# EAGLE board harp rfid reader (EAGLE 9.5.1)
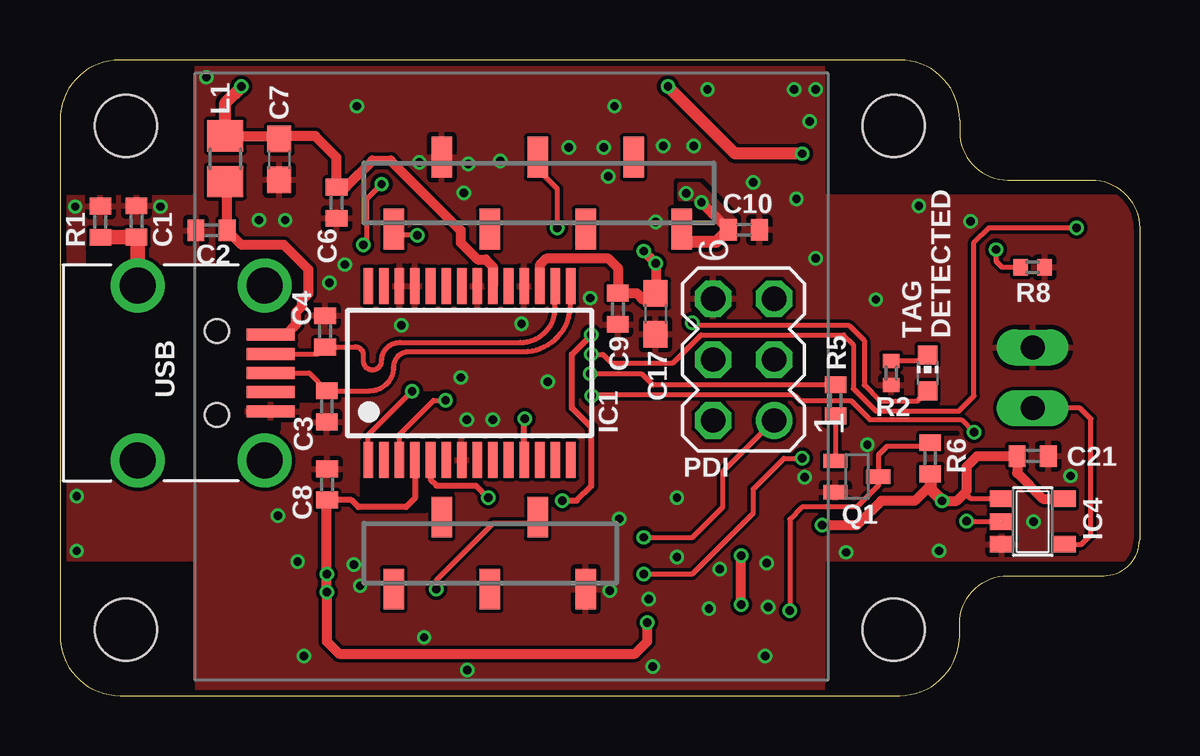
[diagram p0: board, top side]
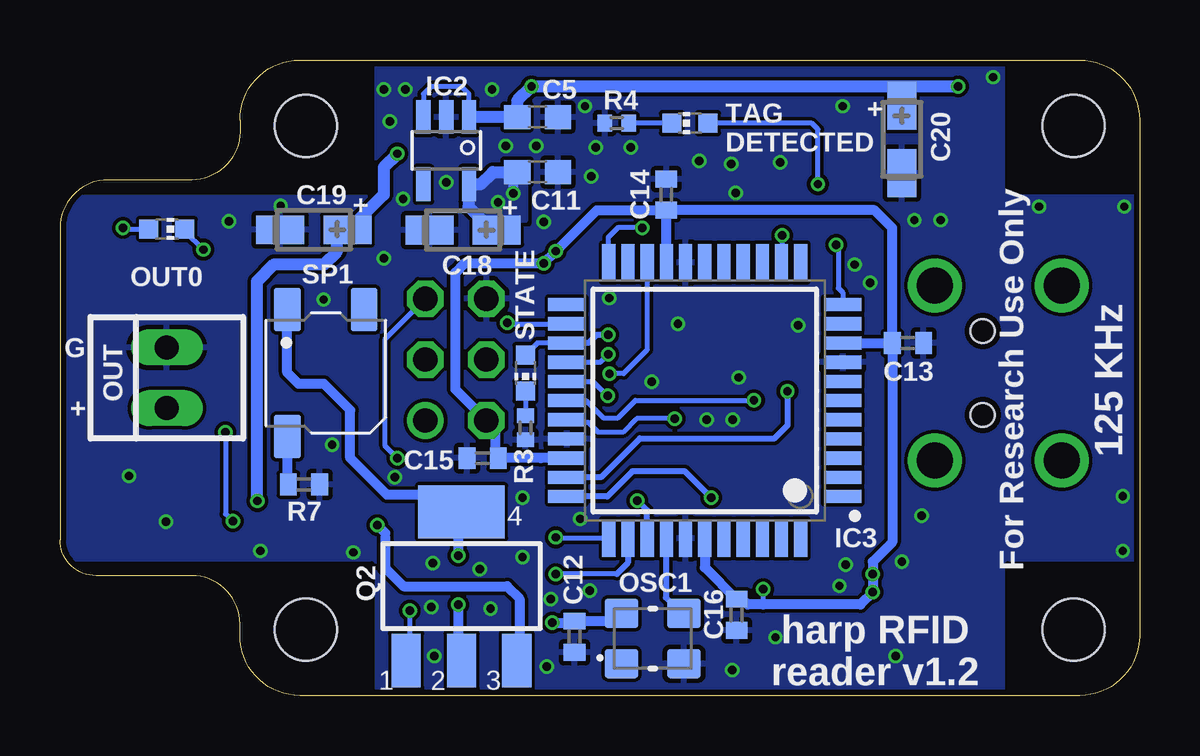
[diagram p1: board, bottom side, seen from below]

Size 45 x 26.5 mm. Coordinates in mm from the lower left corner, seen from the top.
Outline: 35,0 arc90 37.5,2.5 37.5,3 arc-90 39.5,5 43.5,5 arc90 45,6.5 45,19.5 arc90 43,21.5 39.5,21.5 arc-90 37.5,23.5 37.5,24 arc90 35,26.5 2.5,26.5 arc90 0,24 0,2.5 arc90 2.5,0 35,0
Copper layers (1*16): Top 0.018mm / dielectric 1.55mm / Bottom 0.018mm
Design rules "eC_2Layer_PClass6_BaseCopperO18_eCDefault *": minimum track width 0.15mm, minimum drill 0.35mm, track to track 0.15mm, track to pad 0.15mm, pad to pad 0.15mm, via to via 0.15mm, smd to smd 0mil, copper to edge 0.25mm, drill to drill 0.35mm, minimum pad ring 0.175mm, minimum via ring 0.125mm, stop-mask expansion 0mil, vias tented up to drill 0.45mm, thermal gap 0.2mm
Holes 2.6 mm at 2.75,23.75 34.75,23.75 2.75,2.75 34.75,2.75
tRestrict: 17 lines
bRestrict: 9 lines

## Footprints (pad centres in the part's own frame; a part is rotated, then mirrored left to right if it is on the bottom)
C0402 = smd 0.7 x 0.9: 1 -0.65,0; 2 0.65,0
C0603 = smd 1.1 x 1: 1 -0.85,0; 2 0.85,0
CT3216 = smd 2 x 1.2: + -1.4,0; - 1.4,0
SSOP28 = smd 0.4 x 1.5: 1 -4.225,-3.625; 2 -3.575,-3.625; 3 -2.925,-3.625; 4 -2.275,-3.625; 5 -1.625,-3.625; 6 -0.975,-3.625; 7 -0.325,-3.625; 8 0.325,-3.625; 9 0.975,-3.625; 10 1.625,-3.625; 11 2.275,-3.625; 12 2.925,-3.625; 13 3.575,-3.625; 14 4.225,-3.625; 15 4.225,3.625; 16 3.575,3.625; 17 2.925,3.625; 18 2.275,3.625; 19 1.625,3.625; 20 0.975,3.625; 21 0.325,3.625; 22 -0.325,3.625; 23 -0.975,3.625; 24 -1.625,3.625; 25 -2.275,3.625; 26 -2.925,3.625; 27 -3.575,3.625; 28 -4.225,3.625
TSOT23-5 = smd 0.6 x 1.408: 1 -0.95,-1.404; 2 0,-1.404; 3 0.95,-1.404; 4 0.95,1.404; 5 -0.95,1.404
QFP80P1200X1200X120-44N = smd 1.55 x 0.55: 1 -5.75,4; 2 -5.75,3.2; 3 -5.75,2.4; 4 -5.75,1.6; 5 -5.75,0.8; 6 -5.75,0; 7 -5.75,-0.8; 8 -5.75,-1.6; 9 -5.75,-2.4; 10 -5.75,-3.2; 11 -5.75,-4; 23 5.75,-4; 24 5.75,-3.2; 25 5.75,-2.4; 26 5.75,-1.6; 27 5.75,-0.8; 28 5.75,0; 29 5.75,0.8; 30 5.75,1.6; 31 5.75,2.4; 32 5.75,3.2; 33 5.75,4 | smd 0.55 x 1.55: 12 -4,-5.75; 13 -3.2,-5.75; 14 -2.4,-5.75; 15 -1.6,-5.75; 16 -0.8,-5.75; 17 0,-5.75; 18 0.8,-5.75; 19 1.6,-5.75; 20 2.4,-5.75; 21 3.2,-5.75; 22 4,-5.75; 34 4,5.75; 35 3.2,5.75; 36 2.4,5.75; 37 1.6,5.75; 38 0.8,5.75; 39 0,5.75; 40 -0.8,5.75; 41 -1.6,5.75; 42 -2.4,5.75; 43 -3.2,5.75; 44 -4,5.75
SOT23-5 = smd 0.69 x 0.99: 1 -0.95,-1.29; 2 0,-1.29; 3 0.95,-1.29; 4 0.95,1.3; 5 -0.95,1.3
R0805 = smd 1.3 x 1.5: 1 -0.95,0; 2 0.95,0
CNP-MISCELLANEOUS_OSCILLATOR_3.2X2.5 = smd 1.4 x 1.2: P$1 -1.3,-1.05; P$2 1.3,-1.05; P$3 1.3,1.05; P$4 -1.3,1.05
22-23-2021 = drill 1 long: 1 -1.27,0; 2 1.27,0
CHIP-LED0603 = smd 0.8 x 0.8: A 0,-0.75; C 0,0.75
MA03-2 = drill 1.016: 1 -2.54,-1.27 | drill 1.016 octagon: 2 -2.54,1.27; 3 0,-1.27; 4 0,1.27; 5 2.54,-1.27; 6 2.54,1.27
SOT323-BEC = smd 0.6 x 1: B -0.65,-0.9; C 0,0.9; E 0.65,-0.9
SOT223 = smd 1.219 x 2.235: 1 -2.311,-3.099; 2 0,-3.099; 3 2.311,-3.099 | smd 3.6 x 2.2: 4 0,3.099
R0402 = smd 0.7 x 0.9: 1 -0.65,0; 2 0.65,0
R0402' = smd 0.6 x 0.7: 1 -0.5,0; 2 0.5,0
BUZZER-COIL_SMT-0540-S-R = smd 1.1 x 1.8: 3 1.6,2.65; + -1.6,2.65; - -1.6,-2.65
ID-12_SMD = smd 0.85 x 1.7: 1 16.248,3.81; 2 14.248,6.81; 3 12.248,3.81; 4 10.248,6.81; 5 8.248,3.81; 6 8.248,18.822; 7 10.248,21.822; 8 12.248,18.822; 9 14.248,21.822; 10 16.248,18.822; 11 20.248,18.822; NC 18.248,21.822
240-0002-1 = smd 0.5 x 2: P$1 -1.6,8.65; P$2 -0.8,8.65; P$3 0,8.65; P$4 0.8,8.65; P$5 1.6,8.65 | drill 1.5: SHIELD_1 -3.65,3.1; SHIELD_2 3.65,3.1; SHIELD_3 3.65,8.4; SHIELD_4 -3.65,8.4 | hole 1: -1.75,6.4; 1.75,6.4

## Placement (x,y rotation side)
C1  4.7nF  [C0402]  3.19,19.77 90 top
C2  100nF  [C0402]  6.32,19.39 180 top
C3  47pF  [C0402]  11.12,12.06 270 top
C4  47pF  [C0402]  11.05,15.18 90 top
C5  10uF  [C0603]  25.09,24.12 0 bottom
C6  100nF  [C0402]  11.53,20.55 270 top
C7  10uF  [C0603]  9.14,22.35 270 top
C8  100nF  [C0402]  11.13,8.8 90 top
C9  100nF  [C0402]  23.26,16.13 270 top
C10  100nF  [C0402]  28.51,19.42 0 top
C11  10uF  [C0603]  25.09,21.83 0 bottom
C12  100nF  [C0402]  23.55,2.46 270 bottom
C13  100nF  [C0402]  9.65,14.7 0 bottom
C14  100nF  [C0402]  19.72,20.88 90 bottom
C15  100nF  [C0402]  27.38,9.9 180 bottom
C16  100nF  [C0402]  16.8,3.37 270 bottom
C17  10uF  [C0603]  24.83,15.92 270 top
C18  100uF  [CT3216]  28.19,19.41 180 bottom
C19  100uF  [CT3216]  34.42,19.42 180 bottom
C20  100uF  [CT3216]  9.91,23.19 270 bottom
C21  100nF  [C0402]  40.55,9.99 0 top
IC1  FT232RL  [SSOP28]  17.07,13.45 0 top
IC2  LP5907MFX-3.3  [TSOT23-5]  28.9,22.72 180 bottom
IC3  ATXMEGA32A4U-AU  [QFP80P1200X1200X120-44N]  18.12,12.3 180 bottom
IC4  [SOT23-5]  40.55,7.25 270 top
L1  ???  [R0805]  6.89,22.38 270 top
OSC1  CNP-MISCELLANEOUS_OSCILLATOR  [CNP-MISCELLANEOUS_OSCILLATOR_3.2X2.5]  20.29,2.38 0 bottom
OUT  22-23-2021  [22-23-2021]  40.55,13.25 90 bottom
OUT0  [CHIP-LED0603]  40.55,19.45 270 bottom
PDI  [MA03-2]  28.49,14.01 90 top
Q1  BC817-40W  [SOT323-BEC]  33.22,9.13 270 top
Q2  [SOT223]  28.27,4.56 0 bottom
R1  1M  [R0402]  1.68,19.75 90 top
R2  1k  [R0402']  34.65,13.45 90 top
R3  1k  [R0402']  25.6,11.16 90 bottom
R4  1k  [R0402']  21.79,23.86 0 bottom
R5  10k  [R0402]  32.33,12.31 270 top
R6  1k  [R0402]  36.27,9.89 90 top
R7  75 >1/4W  [R0402]  34.83,8.8 180 bottom
R8  1k  [R0402']  40.55,17.86 180 top
SP1  BUZZER-COIL_SMT-0540-S-R  [BUZZER-COIL_SMT-0540-S-R]  33.92,13.45 0 bottom
STATE  [CHIP-LED0603]  25.6,13.45 180 bottom
TAG_B  [CHIP-LED0603]  18.74,23.86 90 bottom
TAG_T  [CHIP-LED0603]  36.16,13.45 0 top
U1  ID-12/20SMD  [ID-12_SMD]  5.67,0.63 0 top
USB  [240-0002-1]  0.13,13.45 270 top

## Library data of the parts
C1-C17 C21 L1 R1 R5-R7 = rcl
C18-C20 = rcl; SPICEPREFIX: C
IC1 = ftdichip; MPN: FT232RL; OC_FARNELL: 1146032; OC_NEWARK: 91K9918
IC2 = CNP
IC3 = xmega-a4
IC4 = 74xx-little-de
OSC1 SP1 = harp rfid reader v1.0
OUT = con-molex; MF: MOLEX; MPN: 22-23-2021; OC_FARNELL: 1462926; OC_NEWARK: 25C3832
OUT0 STATE TAG_B TAG_T = led
PDI = con-lstb; OC_FARNELL: unknown; OC_NEWARK: unknown
Q1 = transistor-npn
Q2 = zetex; OC_FARNELL: unknown; OC_NEWARK: unknown
R2-R4 R8 = rcl; SPICEPREFIX: R
U1 = SparkFun
USB = CNP-connectors

## Nets
+5V: C5.1 C6.1 C7.1 C19.+ C20.+ C21.1 IC1.20 IC2.1 IC2.3 IC4.1 IC4.5 L1.1 Q2.3 R6.1
BUZ: IC3.20 R5.1
BUZ_T: Q2.2 Q2.4 SP1.+
DETECT1: IC3.11 TAG_B.A
DETECT2: IC3.24 TAG_T.A
F2: IC3.13 U1.6
FT_CTS: IC1.11 IC3.29
FT_RTS: IC1.3 IC3.28
FT_RXD: IC1.5 IC3.33
FT_TXD: IC1.1 IC3.32
GND: C1.2 C2.2 C3.2 C4.2 C5.2 C6.2 C7.2 C8.2 C9.2 C10.2 C11.2 C12.2 C13.2 C14.2 C15.2 C16.2 C17.2 C18.- C19.- C20.- C21.2 IC1.7 IC1.18 IC1.21 IC1.25 IC1.26 IC2.2 IC3.8 IC3.18 IC3.30 IC3.38 IC4.3 OSC1.P$2 OUT.2 PDI.6 Q1.E R1.2 R2.1 R3.1 R4.1 R7.1 R8.1 U1.1 U1.7 USB.P$5
N$1: C10.1 C11.1 C18.+ IC2.5 U1.11
N$2: R3.2 STATE.C
N$3: C1.1 R1.1 USB.SHIELD_1
N$4: R4.2 TAG_B.C
N$5: R2.2 TAG_T.C
N$6: OUT0.C R8.2
N$7: IC4.4 OUT.1
N$20: R7.2 SP1.-
N$25: Q1.C Q2.1 R6.2
N$27: Q1.B R5.2
N$39: C2.1 L1.2 USB.P$1
OSC1: IC3.37 OSC1.P$3
OUT0: IC3.27 IC4.2
OUT0_LED: IC3.26 OUT0.A
PDI-CLK: IC3.35 PDI.5
PDI-DATA: IC3.34 PDI.1
STATE: IC3.25 IC3.36 STATE.A
TX: IC3.22 U1.9
USBDM: C4.1 IC1.16 USB.P$2
USBDP: C3.1 IC1.15 USB.P$3
VCCIO: C8.1 C9.1 C12.1 C13.1 C14.1 C15.1 C16.1 C17.1 IC1.4 IC1.17 IC3.9 IC3.19 IC3.31 IC3.39 OSC1.P$4 PDI.2 U1.2

## Tracks (layer width: path | path; a pad name or v marks a point on that pad's centre or on a via)
+5V  (via drill 0.35)
  Top 0.203: IC4.1 37.97,8.2 37.72,8.46
  Top 0.406: R6.1 36.27,8.76 35.63,8.12 34.23,8.12 33.22,7.1 v31.76,7.1 | IC1.20 18.05,17.88 17.75,18.18 17.41,18.18 16.71,18.88 16.71,19.39 13.79,22.31 13.02,22.31 11.91,21.2 C6.1 11.53,22.44 10.64,23.33 9.01,23.33 | L1.1 9.01,23.33 | 9.01,23.33 C7.1 | v36.77,8.12 37.38,8.12 37.72,8.46 37.8,8.53 37.8,9.55 38.23,9.99 C21.1 39.9,9.28 40.97,8.2 IC4.5
  Top 0.508: L1.1 6.89,24.72 v7.56,25.39 | R6.1 36.27,8.62 v36.77,8.12 | v30.93,22.59 28.14,22.59 v25.34,25.39
  Bottom 0.203: IC2.1 27.95,25.07 28.27,25.39 29.54,25.39 29.85,25.07 IC2.3 | 31.44,6.78 31.44,6.59
  Bottom 0.406: v31.76,7.1 31.44,6.78 | 31.44,6.59 31.44,5.32 30.68,4.56 26.36,4.56 25.85,4.05 25.85,1.56 Q2.3
  Bottom 0.508: IC2.1 C5.1 25.94,24.79 v25.34,25.39 9.96,25.39 | v7.56,25.39 9.96,25.39 | v36.77,8.12 36.78,8.12 36.78,17.27 36.07,17.98 33.98,17.98 33.45,18.52 33.45,18.93 C19.+ 32.88,19.51 31.5,20.88 31.5,22.02 v30.93,22.59 | C20.+ 9.91,25.34 9.96,25.39
BUZ  (via drill 0.35)
  Top 0.203: v22.09,13.43 24.23,13.43 24.71,12.94 32.31,12.94 R5.1
  Bottom 0.203: IC3.20 20.52,14.41 21.51,13.43 v22.09,13.43
BUZ_T  (via drill 0.35)
  Top 0.406: v28.39,3.8 v28.39,5.83
  Bottom 0.406: Q2.2 28.39,1.59 v28.39,3.8 | v28.39,5.83 28.39,7.53 Q2.4 28.27,7.99 28.65,8.37 31.37,8.37 32.9,9.9 32.9,11.9 34,13 35.06,13 35.52,13.46 SP1.+
DETECT1  (via drill 0.35)
  Top 0.203: v12.64,18.78 12.77,18.91 12.77,20.69 v13.41,21.32
  Bottom 0.203: v13.41,21.32 13.41,23.61 13.66,23.86 TAG_B.A | IC3.11 12.37,16.8 12.55,16.98 12.55,18.69 v12.64,18.78
DETECT2  (via drill 0.35)
  Top 0.203: v26.36,15.55 26.49,15.42 32.9,15.42 33.52,14.8 33.52,12.94 34.18,12.28 35.75,12.28 TAG_T.A
  Bottom 0.203: v26.36,15.55 26.31,15.5 IC3.24
F2  (via drill 0.35)
  Top 0.203: v14.9,19.19 14.17,19.19 U1.6
  Bottom 0.203: v14.9,19.19 14.9,18.08 IC3.13
FT_CTS  (via drill 0.35)
  Top 0.254: IC1.11 19.35,11.52 v19.38,11.54
  Bottom 0.203: v19.38,11.54 20.97,11.54 21.54,10.97 22.55,10.97 22.96,11.38 23.75,11.38 IC3.29
FT_RTS  (via drill 0.35)
  Top 0.203: IC1.3 14.15,10.89 15.56,12.31 v16.07,12.31
  Bottom 0.203: IC3.28 23.07,12.3 22.35,11.58 21.74,11.58 21.02,12.31 v16.07,12.31
FT_RXD  (via drill 0.35)
  Top 0.254: IC1.5 15.45,8.99 15.69,8.75 17.34,8.75 v17.85,8.24
  Bottom 0.254: v17.85,8.24 18.95,9.35 21.14,9.35 22.18,8.3 IC3.33
FT_TXD  (via drill 0.35)
  Top 0.203: IC1.1 12.85,10.86 v14.68,12.69
  Bottom 0.254: v14.68,12.69 14.68,11.27 15.22,10.72 20.83,10.72 22.45,9.1 IC3.32
GND  (via drill 0.35)
  other vias: 28.89,21.4 30.61,25.27 31.5,25.27 31.24,23.94 34.01,16.51 31.5,18.22 30.7,20.71 35.8,20.42 24.83,19.75 22.86,21.65 22.67,22.86 25.15,22.92 26.42,22.92 29.4,1.65 24.7,1.21 24.54,4.03 27.05,3.62 29.53,3.68 27.5,5.27 29.46,5.52 25.72,5.78 22.92,4.38 23.3,7.37 25.72,8.26 32.77,5.97 36.64,6.03 33.66,10.46 31.04,9.11 16.98,1.07 15.18,2.43 10.16,1.65 12.51,4.57 12.26,5.46 9.91,5.59 9.08,7.49 0.7,6.03 0.7,8.32 20.33,13.08 18.03,11.49 16.95,11.49 16.7,13.26 22.1,16.57 19.24,15.49 14.22,15.43 11.23,17.21 11.87,17.97 0.64,20.38 4.19,20.38 17.02,22.16 16.83,20.95 18.35,22.29 14.99,22.23 21.21,22.86 12.38,24.57 23.11,24.57 26.99,25.27 6.1,25.78 8.29,19.82 9.39,19.82 40.58,7.25 42.13,9.16 37.96,19.77
  pour Bottom (rank 2): 45.5,-0.5 45.5,27 0,27 0,-0.5
  pour Top (rank 2): 46,-0.5 46,27 0,27 0,-0.5
N$1  (via drill 0.35)
  Top 0.406: C10.1 27.86,19.44 v26.74,20.56
  Top 0.508: C10.1 27.35,18.91 25.91,18.91 U1.11
  Bottom 0.406: C11.1 26.11,21.67 v26.11,20.94
  Bottom 0.508: C11.1 26.96,21.83 27.47,21.32 IC2.5 27.98,21.29 27.98,20.38 27,19.41 C18.+
  pour Bottom (no thermals): 25.6,21.73 25.6,19.8 27.68,19.8 27.68,21.02 26.97,21.73
  pour Top (no thermals): 25.85,21.32 26.61,21.32 28.13,19.81 28.13,19.54 27.62,19.54 26.61,20.55 26.61,20.56 26.49,20.69 25.85,20.69
N$2
  Bottom 0.203: STATE.C R3.2
N$3
  Top 0.61: R1.1 1.7,19.12 C1.1 3.23,19.08 USB.SHIELD_1
N$4
  Bottom 0.203: TAG_B.C R4.2
N$5
  Top 0.203: TAG_T.C 35.91,13.95 R2.2
N$6  (via drill 0.35)
  Top 0.203: v39.01,18.59 39.01,18.11 39.27,17.86 R8.2
  Bottom 0.203: OUT0.C 39.8,19.38 v39.01,18.59
N$7
  Top 0.203: IC4.4 42.58,6.3 42.98,6.71 42.98,11.53 42.52,11.99 OUT.1
N$20
  Bottom 0.406: R7.2 35.52,8.84 SP1.-
N$25  (via drill 0.35)
  Top 0.203: R6.2 36.13,10.4 34.49,10.4 34.12,10.03 Q1.C 34.12,8.76 33.22,7.86 30.93,7.86 30.42,7.35 v30.42,3.54
  Bottom 0.203: v30.42,3.54 30.42,1.61 Q2.1
N$27
  Top 0.203: R5.2 32.33,9.79 Q1.B
N$39
  Top 0.406: USB.P$1 9.42,15.05 9.85,15.48 9.85,15.99 10.1,16.24 10.1,16.5 10.36,16.75 10.36,17.77 9.34,18.78 7.58,18.78 C2.1 6.97,21.36 L1.2
OSC1
  Bottom 0.254: IC3.37 19.75,6.52 19.75,4.09 19.09,3.43 OSC1.P$3
OUT0  (via drill 0.35)
  Top 0.203: v22.17,12.5 22.2,12.52 30.61,12.52 30.84,12.29 32.97,12.29 33.76,11.51 37.57,11.51 v38.1,10.97 | v37.8,7.26 39.25,7.26 IC4.2
  Bottom 0.203: IC3.27 22.78,13.1 v22.17,12.5 | v38.1,10.97 38.1,7.57 v37.8,7.26
OUT0_LED  (via drill 0.35)
  Top 0.203: v22.15,14.22 22.63,14.22 22.99,13.87 25.55,13.87 26.72,15.04 32.66,15.04 33.07,14.63 33.07,12.8 34.01,11.86 37.46,11.86 38.1,12.5 38.1,18.9 38.71,19.51 v42.37,19.51
  Bottom 0.203: IC3.26 22.47,13.9 v22.15,14.22 | v42.37,19.51 42.31,19.45 OUT0.A
PDI-CLK  (via drill 0.35)
  Top 0.203: v24.33,5.07 26.36,5.07 28.9,7.61 28.9,8.62 30.17,9.89 v30.93,9.89
  Bottom 0.203: 21.79,5.07 v24.33,5.07 | v30.93,9.89 31.44,10.4 31.44,14.87 PDI.5
  Bottom 0.254: IC3.35 21.32,5.53 21.79,5.07
PDI-DATA  (via drill 0.35)
  Top 0.203: v24.33,6.59 26.36,6.59 27.63,7.86 27.63,9.34 PDI.1
  Bottom 0.203: IC3.34 24.29,6.55 v24.33,6.59
STATE  (via drill 0.35)
  Top 0.254: v20.93,8.13 21.54,8.13 22.15,8.74 22.15,11.18 21.34,11.99 21.34,14.22 v22.15,15.04
  Bottom 0.203: IC3.25 23.98,14.7 25.1,14.7 STATE.A
  Bottom 0.254: IC3.36 20.52,7.72 v20.93,8.13 | v22.15,15.04 22.63,15.04 22.97,14.7 23.98,14.7
TX  (via drill 0.35)
  Top 0.203: U1.9 19.91,21.95 20.73,21.13 v20.73,19.51
  Bottom 0.203: v20.73,19.51 21.74,19.51 22.15,19.1 22.15,18.07 IC3.22
USBDM
  Top 0.203: USB.P$2 10.77,14.25 C4.1 12.32,14.53 arc-90 12.64,14.21 12.64,13.96 arc90 13.03,13.58 arc90 13.41,13.96 arc-90 14.17,14.72 19.2,14.72 arc90 20.64,16.17 IC1.16 arc-90 IC1.16
USBDP
  Top 0.203: USB.P$3 10.38,13.45 C3.1 12.92,12.71 arc90 13.91,13.7 arc-90 14.55,14.34 19.32,14.34 arc90 21.28,16.3 21.28,17.06 arc-90 IC1.15
VCCIO  (via drill 0.35)
  Top 0.203: U1.2 19.66,7.18 18.06,7.18 15.69,4.81 v15.69,4.43
  Top 0.254: IC1.4 14.8,8.24 14.42,7.86 12.44,7.86 12.15,8.15 11.37,8.15 C8.1
  Top 0.406: IC1.17 20,17.95 20.26,18.21 22.87,18.21 23.26,17.83 C9.1 24.05,16.78 24.33,16.5 24.56,16.5 C17.1 24.84,16.79 v24.84,18.01 v24.33,18.53 | v24.48,3.04 24.48,2.26 23.97,1.75 11.63,1.75 11.12,2.26 v11.12,4.31 v11.12,5.07 11.12,7.9 11.37,8.15
  Bottom 0.203: v15.69,4.43 15.69,3.8 | 22.09,3.11 21.91,3.11 OSC1.P$4
  Bottom 0.406: C13.1 10.3,19.49 11.05,20.23 C14.1 | C14.1 22.62,20.23 v24.33,18.53 v24.84,18.02 28.14,18.02 28.52,17.64 28.52,12.76 PDI.2 26.87,11.11 26.87,10.29 26.73,10.15 C15.1 24.95,9.9 IC3.31 | C13.1 10.3,6.39 11.12,5.58 v11.12,4.31 11.63,3.8 15.69,3.8 16.33,3.8 16.55,4.02 C16.1 18.12,5.34 IC3.39 | v24.48,3.04 23.62,3.04 C12.1 22.09,3.11 | IC3.19 C14.1 | C14.1 | IC3.9 C13.1 | C13.1

## Text on the board
tPlace: TAG / DETECTED
bPlace: + | TAG / DETECTED | + | + | OUT0 | G | 125 KHz | For Research Use Only | + | harp RFID / reader v1.2
Measures: USB | RFID / Antenna | PCB | Screw / Terminal | Dimensions (mm)